# Altium PCB STC11F04E_SOP20_UTo24G.PcbDoc
Units mil, origin at the board's own origin, x right, y up, seen from the top; angles counter-clockwise.
Board outline 6000 x 4000 mil, 2 copper layers (Top Layer, Bottom Layer); 34 components, 31 nets, 112 pads, 0 vias.
Unrouted connection lines stored in the file: 63.
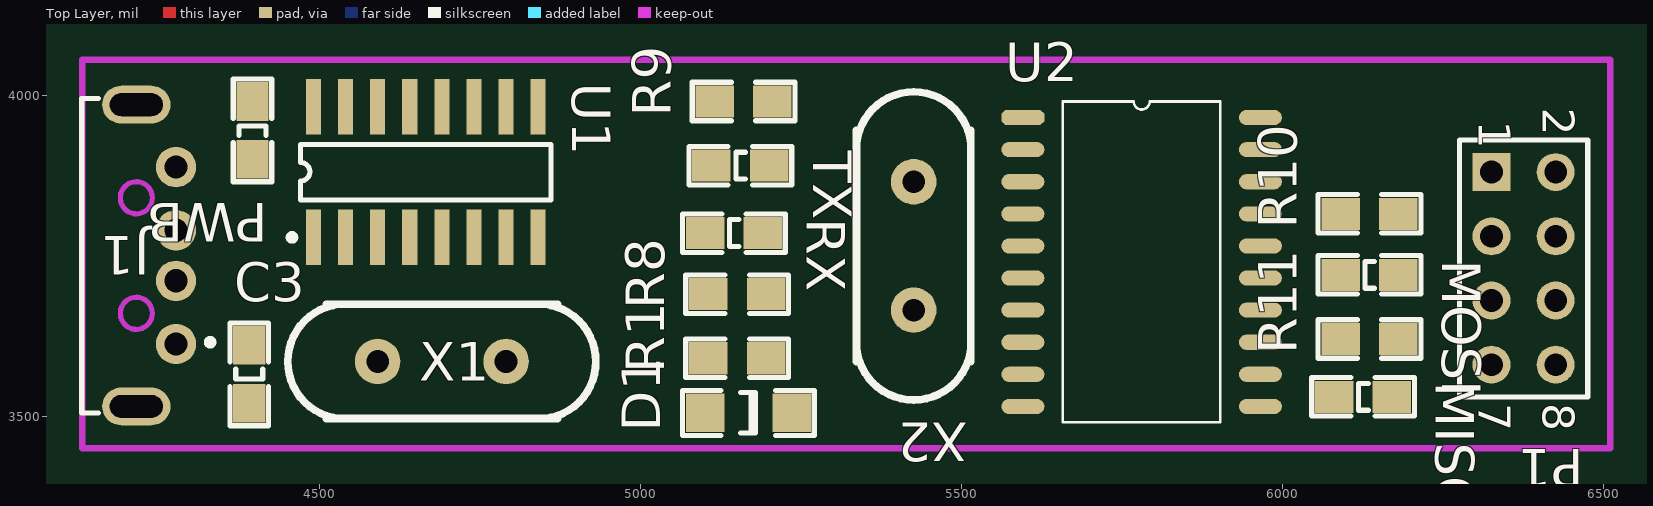
[diagram p0: Top Layer view]
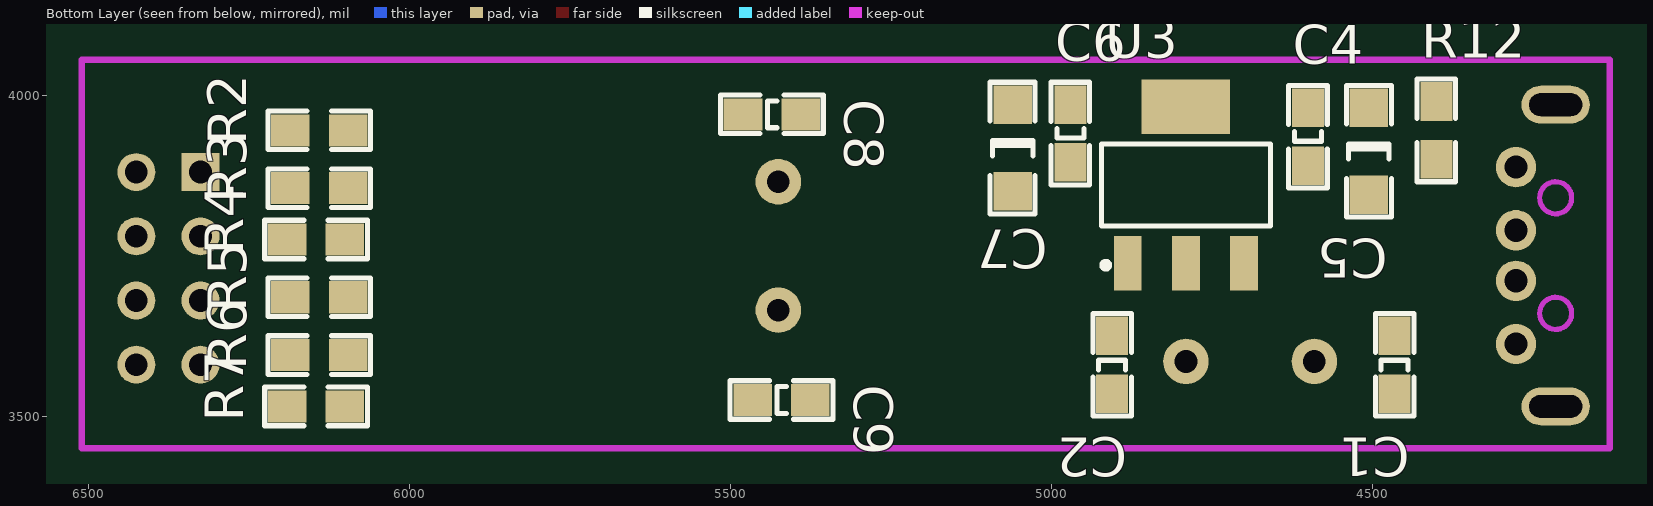
[diagram p1: Bottom Layer view, seen from below]

## Layer stack, top to bottom
Top Layer: signal copper 1.4
Dielectric: dielectric 12.6, FR-4, Dk 4.8
Bottom Layer: signal copper 1.4

## Board outline
2580,2130 2580,6130 8580,6130 8580,2130

## Design rules (kind name [scope] priority, off if disabled: settings)
Clearance [All] p1: gap=10
FabricationTestPointUsage TestPointUsage [All] p1: valid=0 allowmultiple=FALSE
FabricationTestpoint Testpoint [All] p1: side=3 testpointundercomponent=TRUE minsize=40 maxsize=100 preferedsize=60 minholesize=0 maxholesize=40 preferedholesize=32 testpointgrid=1 allowsidetop=TRUE allowsidebottom=TRUE usegrid=TRUE gridtolerance=0.01
PolygonConnect [All] p1: connectstyle=Relief reliefconductorwidth=10 reliefentries=4 polygonreliefangle="90 Angle"
RoutingVias [All] p1: holewidth=28 width=50 viastyle="Through Hole" minholewidth=28 minwidth=50 maxholewidth=28 maxwidth=50
SilkscreenOverComponentPads [All] p1: minsilkscreentomaskgap=10
SolderMaskExpansion [All] p1: expansion=4
Width [All] p1: maxlimit=10 minlimit=10 preferedwidth=10
25 further rules are at their usual default settings.

## Components (designator, comment, footprint, x,y, rotation, side; value= is the part's Value field where it differs from the comment)
C1 "Cap" C0805 4465,3625 r270 bottom
C2 "Cap" C0805 4905,3625 r270 bottom
C3 "Cap" C0805 4390,3520 r90 top
C4 "Cap" C0805 4600,3890 r90 bottom
C5 "Cap2" C1206A 4505,3980 r270 bottom
C6 "Cap" C0805 4970,3895 r90 bottom
C7 "Cap2" C1206A 5060,3985 r270 bottom
C8 "Cap" C0805 5480,3970 r180 bottom
C9 "Cap" C0805 5465,3525 r180 bottom
D1 "1N4148" C1206A 5235,3505 r180 top
J1 "USB" USB-A-G 4245,3750 r180 top
MISO "LED-2P" C0805 6080,3530 r0 top
MOSI "LED-2P" C0805 6090,3720 r0 top
P1 "Header 4X2" HDR2X4 6325,3880 r270 top
PWB "LED-2P" C0805 4395,3990 r270 top
R1 "Res" 0805 5195,3590 r180 top
R2 "Res" 0805 6095,3945 r0 bottom
R3 "Res" 0805 6095,3855 r0 bottom
R4 "Res" 0805 6100,3775 r0 bottom
R5 "Res" 0805 6095,3685 r0 bottom
R6 "Res" 0805 6095,3595 r0 bottom
R7 "Res" 0805 6100,3515 r0 bottom
R8 "Res" 0805 5195,3690 r180 top
R9 "Res" 0805 5205,3990 r180 top
R10 "Res" 0805 6180,3815 r180 top
R11 "Res" 0805 6180,3620 r180 top
R12 "Res" 0805 4400,3900 r90 bottom
RX "LED-2P" C0805 5100,3785 r0 top
TX "LED-2P" C0805 5110,3890 r0 top
U1 "CH340G" SOP16 4665,3840 r0 top
U2 "STC11F04E_20" SOP20 5595,3965 r0 top
U3 "AMS1117" SOT-223 4790,3860 r180 bottom
X1 "XTAL" XTAL1 4590,3585 r0 top
X2 "XTAL" XTAL1 5425,3865 r270 top

## Footprints (in the part's own frame and the unit in brackets; to place one, negate y for a bottom-side part, rotate by r counter-clockwise, add the part's x,y. Pads: shape width x height; smd on the part's side, far side on the other; paste and mask are expansions set on the pad)
0805 [mil]
  rect 60x50 smd: 1(0,0) 2(90,0)
  silkscreen extent -35,-30 125,30
C0805 [mil]
  rect 60x50 smd: 1(0,0) 2(90,0)
  silkscreen extent -35,-30 125,30
C1206A [mil] "Chip Capacitor; Body 3.2 x 1.6 mm (LxW typ)"
  rect 60x60 smd: 1(0,0) 2(135,0)
  silkscreen extent -35,-35 170,35
HDR2X4 [mm] "Connector; Header; 4x2 Position"
  rect 1.5x1.5 hole 0.9: 1(0,0)
  round 1.5 hole 0.9: 2(0,2.54) 3(2.54,0) 4(2.54,2.54) 5(5.08,0) 6(5.08,2.54) 7(7.62,0) 8(7.62,2.54)
  silkscreen extent -1.27,-1.27 8.89,3.81
SOP16 [mm]
  rect 0.6x2.2 smd: 1(-4.445,-1.568) 2(-3.175,-1.568) 3(-1.905,-1.568) 4(-0.635,-1.568) 5(0.635,-1.568) 6(1.905,-1.568) 7(3.175,-1.568) 8(4.445,-1.568) 9(4.445,3.6) 10(3.175,3.6) 11(1.905,3.6) 12(0.635,3.6) 13(-0.635,3.6) 14(-1.905,3.6) 15(-3.175,3.6) 16(-4.445,3.6)
  silkscreen extent -5.42,-1.69 4.95,2.12
SOP20 [mm]
  oct 1.7x0.6 smd: 1(0,0)
  oval 1.7x0.6 smd: 2(0,-1.27) 3(0,-2.54) 4(0,-3.81) 5(0,-5.08) 6(0,-6.35) 7(0,-7.62) 8(0,-8.89) 9(0,-10.16) 10(0,-11.43) 11(9.4,-11.43) 12(9.4,-10.16) 13(9.4,-8.89) 14(9.4,-7.62) 15(9.4,-6.35) 16(9.4,-5.08) 17(9.4,-3.81) 18(9.4,-2.54) 19(9.4,-1.27) 20(9.4,0)
  silkscreen extent 1.58,-12.06 7.82,0.64
SOT-223 [mm] "SOT-223/SC-73; 4 Leads; Body 6.7 x 7.3 mm, inc. leads (LxW"
  rect 1.1x2.15 smd: 1(-2.3,-3.1) 2(0,-3.1) 3(2.3,-3.1)
  rect 3.5x2.15 smd: 4(0,3.1)
  silkscreen extent -3.35,-3.3 3.35,1.63
USB-A-G [mm] "Connector; USB1.1, Series A, Reverse Type, Thru-Hole; 4 Position; Right Angle"
  round 1.6 hole 0.92: 1(-0.785,3.5) 2(-0.785,1) 3(-0.785,-1) 4(-0.785,-3.5)
  oval 2.7x1.5 hole 0.9 slot 2.1 at 0 deg: 5(0.785,5.969) 6(0.785,-5.969)
  Keep-Out Layer circle w0.203: c0.785,-2.286 r0.635
  Keep-Out Layer circle w0.203: c0.785,2.286 r0.635
  silkscreen extent -2.26,-6.22 2.94,6.22
XTAL1 [mm]
  round 1.8 hole 0.9: 1(0,0) 2(5.08,0)
  silkscreen extent -3.56,-2.26 8.64,2.26

## Part data
C1 C2 C3 C4 C5 C6 C7 C8 C9: "Capacitor"
D1: "快速开关二极管"
J1: "USB-B"
MISO MOSI PWB RX TX: "发光二"
P1: "Header, 4-Pin, Dual row"
R1 R2 R3 R4 R5 R6 R7 R8 R9 R10 R11 R12: "Resistor"
U1: "USB 总线转½"
U2: "ÔöÇ¿ÐÍ8051µ"
U3: "低压稳压器-1A"
X1 X2: "Crystal Oscillator"

## Nets (pads, with @x,y where several pads share a name; then routed paths per layer and width w, separated by ;. In a path a pad name is that pad's centre, name@x,y a point inside that pad or via, vN(x,y) a via of type N, cw(c..) or ccw(c..) an arc to the next point about the centre after c; other vN are vias at no path point)
3V3: C6.2 C7.1 P1.2 R8.1 R9.1 R10.1 R11.1 U2.20 U3.2
CE: P1.3 R2.2
CSN: P1.4 R3.2
GND: C1.2 C2.2 C3.1 C4.1 C5.2 C6.1 C7.2 C8.2 C9.2 J1.4 P1.1 PWB.2 U1.1 U2.10 U3.1
IRQ: P1.8 R7.2
MISO: MISO.2 P1.7 R6.2
MOSI: MOSI.2 P1.6 R5.2
NetC1_1: C1.1 U1.7 X1.1
NetC2_1: C2.1 U1.8 X1.2
NetC3_2: C3.2 U1.4
NetC8_1: C8.1 U2.4 X2.1
NetC9_1: C9.1 U2.5 X2.2
NetD1_2: D1.2 U1.2
NetMISO_1: MISO.1 R11.2
NetMOSI_1: MOSI.1 R10.2
NetPWB_1: PWB.1 R12.2
NetR1_2: R1.2 U1.3
NetR8_2: R8.2 RX.1
NetR9_2: R9.2 TX.1
P10: R7.1 U2.12
P11: R6.1 U2.13
P12: R5.1 U2.14
P13: R4.1 U2.15
P14: R3.1 U2.16
P15: R2.1 U2.17
RX: D1.1 RX.2 U2.2
SCK: P1.5 R4.2
TX: R1.1 TX.2 U2.3
UD+: J1.3 U1.5
UD-: J1.2 U1.6
USB5V: C4.2 C5.1 J1.1 R12.1 U1.16 U3.3
pads on no net: J1.5 J1.6 U1.9 U1.10 U1.11 U1.12 U1.13 U1.14 U1.15 U2.1 U2.6 U2.7 U2.8 U2.9 U2.11 U2.18 U2.19 U3.4

## Keep-outs
Keep-Out Layer:
  lines w10: 4130,3450 4130,4055 6510,4055 6510,3450 4130,3450

## Silkscreen, mask and mechanical layers (free items; w line width, h text height)
Mechanical 16:
  drawing of 1874 lines, arcs and shapes, not listed
  text "1" at 1427,7465 h70
  text "2" at 4287,7465 h70
  text "3" at 7167,7465 h70
  text "4" at 10037,7465 h70
  text "A" at 75,6559 h70
  text "A" at 11375,6559 h70
  text "C" at 5275,5037 h70
  text "B" at 75,4667 h70
  text "C" at 75,2757 h70
  text "B" at 5847,2080 h70 r270
  text "ENGINEER:" at 6850,1300 h45
  text "TITLE:" at 8350,1300 h45
  text "PCB DESIGNER:" at 6850,1005 h45
  text "D" at 75,867 h70
  text "D" at 11375,867 h70
  text "DATE:" at 6850,700 h45
  text "PART NO.:" at 8350,700 h45
  text "REV:" at 10450,700 h45
  text "Altium Limited" at 5550,600 h70
  text ".PRINT_DATE" at 6900,580 h70
  text "12a Rodborough Rd" at 5550,500 h70
  text "Frenchs Forest" at 5550,400 h70
  text "FILE NAME:" at 6850,400 h45
  text "DWG NO:" at 8350,400 h45
  text "SCALE:" at 10450,400 h45
  text "NSW 2086" at 5550,300 h70
  text ".PCB_FILE_NAME_NO_PATH" at 6900,280 h70
  text "1" at 1427,65 h70
  text "2" at 4287,65 h70
  text "3" at 7167,65 h70
  text "4" at 10037,65 h70

## Text inside footprints (layer, text, board x,y; h text height)
P1: Top Overlay "8" at 6405,3520 h50 r270; Top Overlay "7" at 6305,3520 h50 r270; Top Overlay "1" at 6305,3960 h50 r270; Top Overlay "2" at 6405,3980 h50 r270